# Altium PCB PCB1.PcbDoc
Units mm, origin at the board's own origin, x right, y up, seen from the top; angles counter-clockwise.
Board outline 45 x 30 mm, 4 copper layers (L1 (Signal), L2 (GND), L3 (PWR), L4 (Signal)), stack 1.57 mm thick; 39 components, 27 nets, 199 pads, 73 vias.
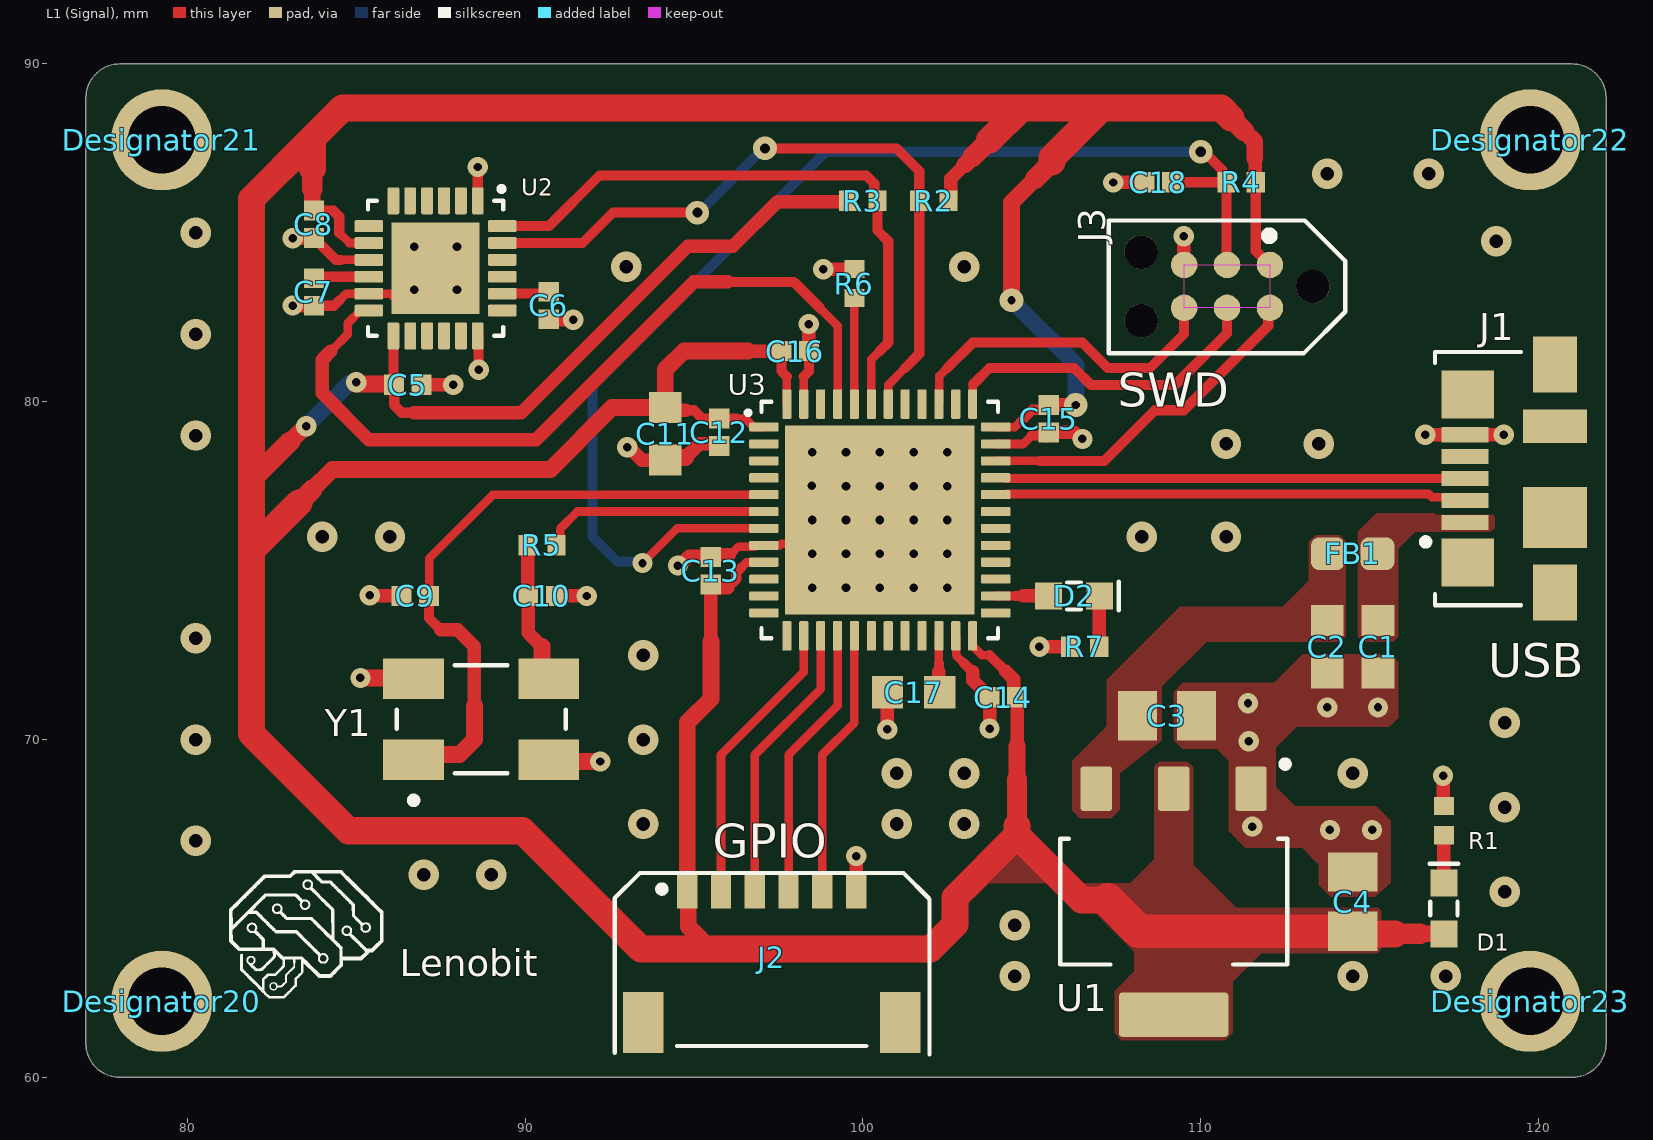
[diagram p0: L1 (Signal) view]
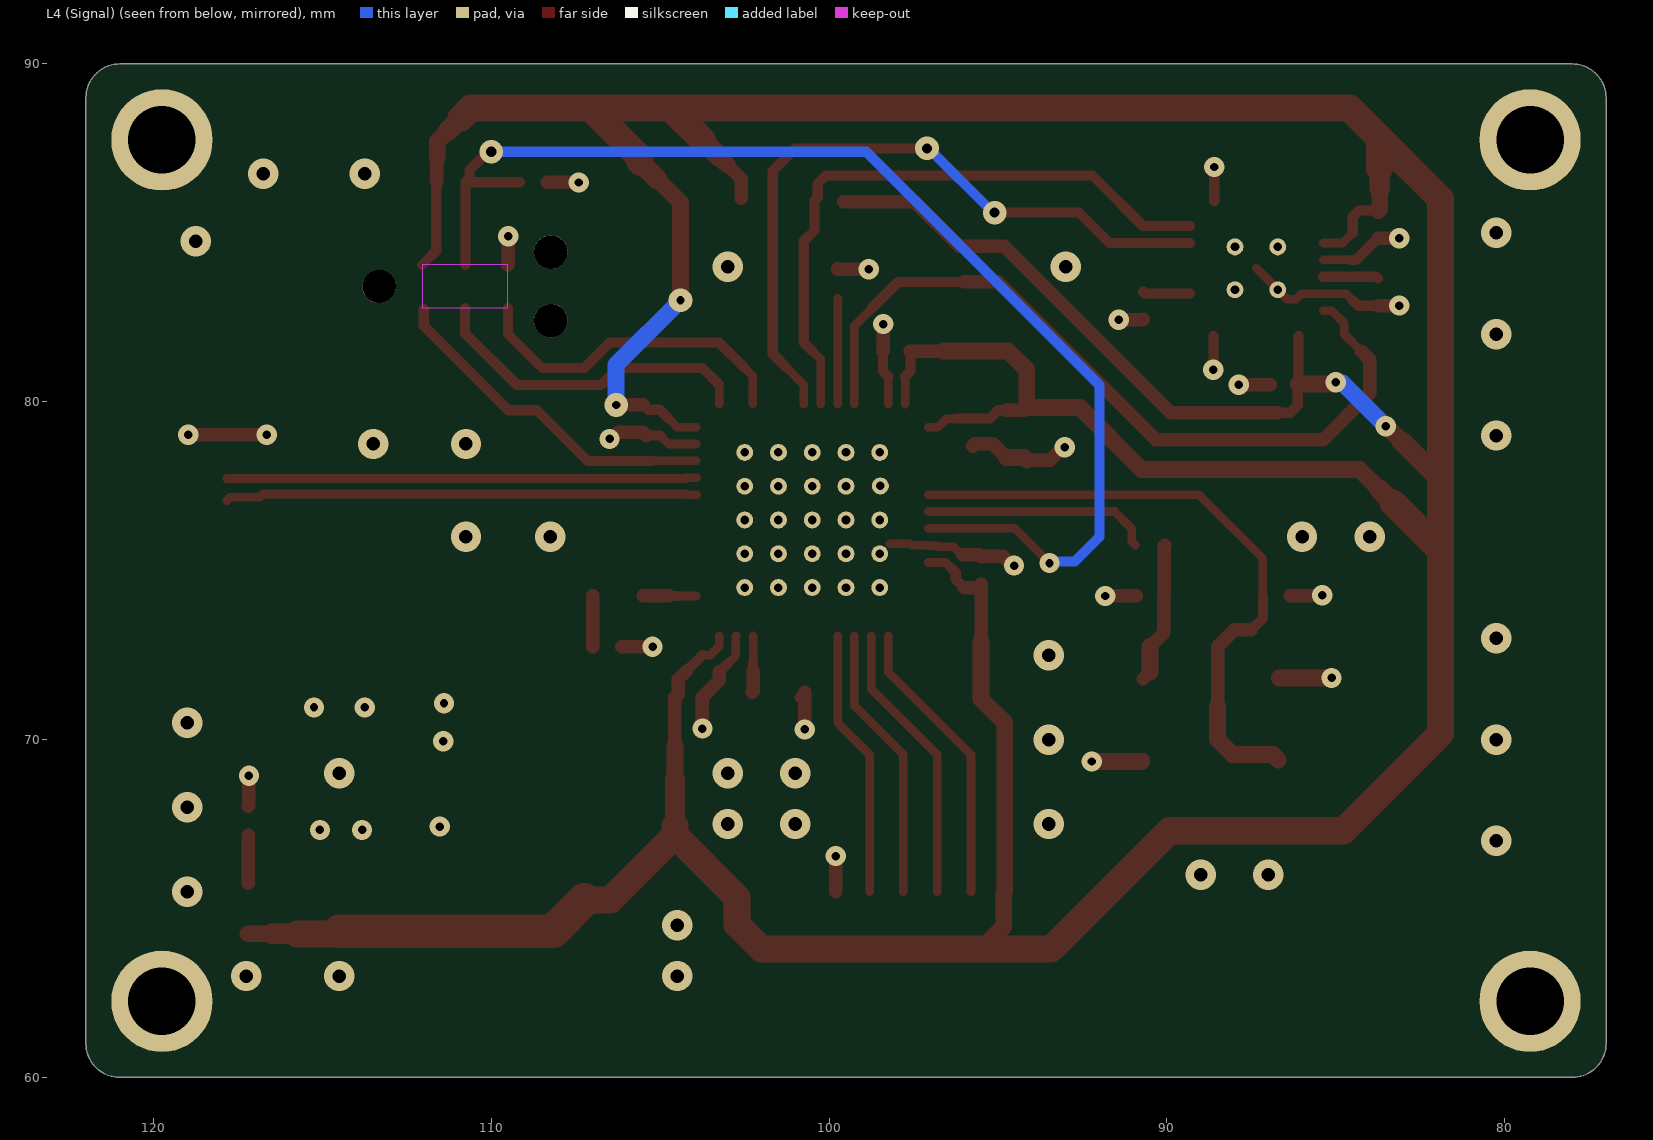
[diagram p1: L4 (Signal) view, seen from below]
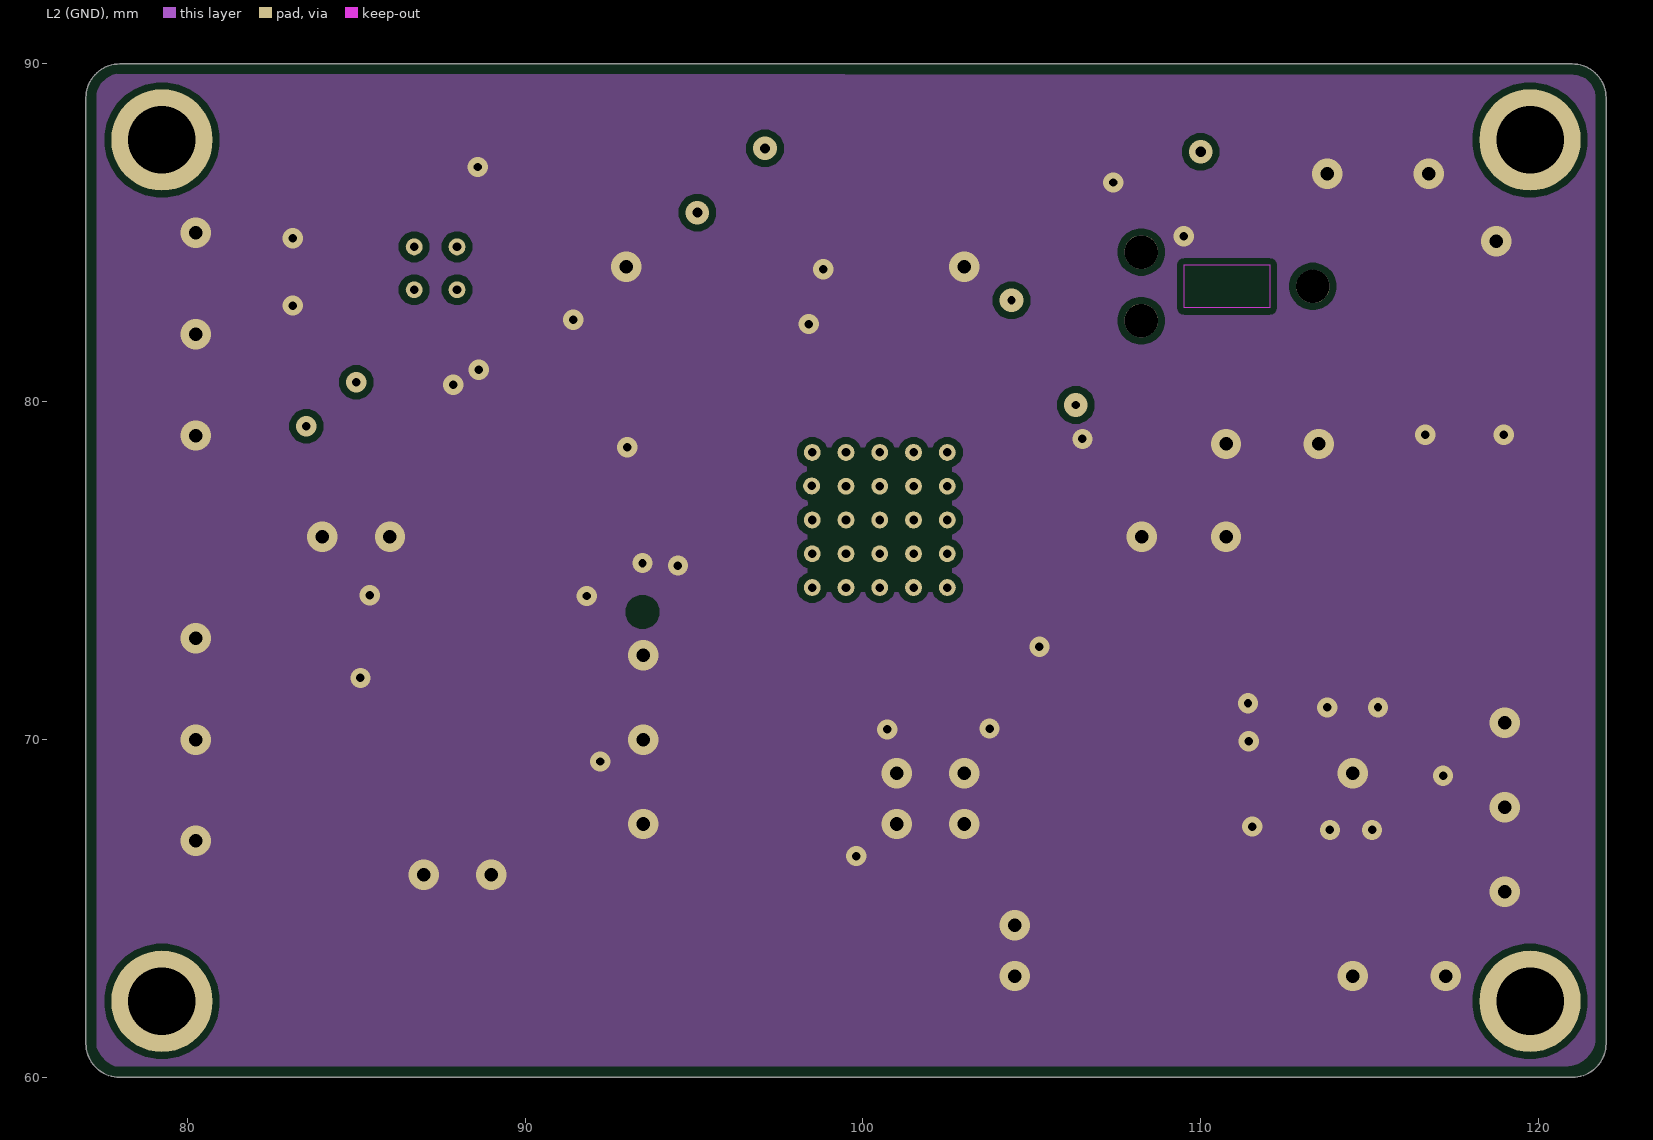
[diagram p2: L2 (GND)]
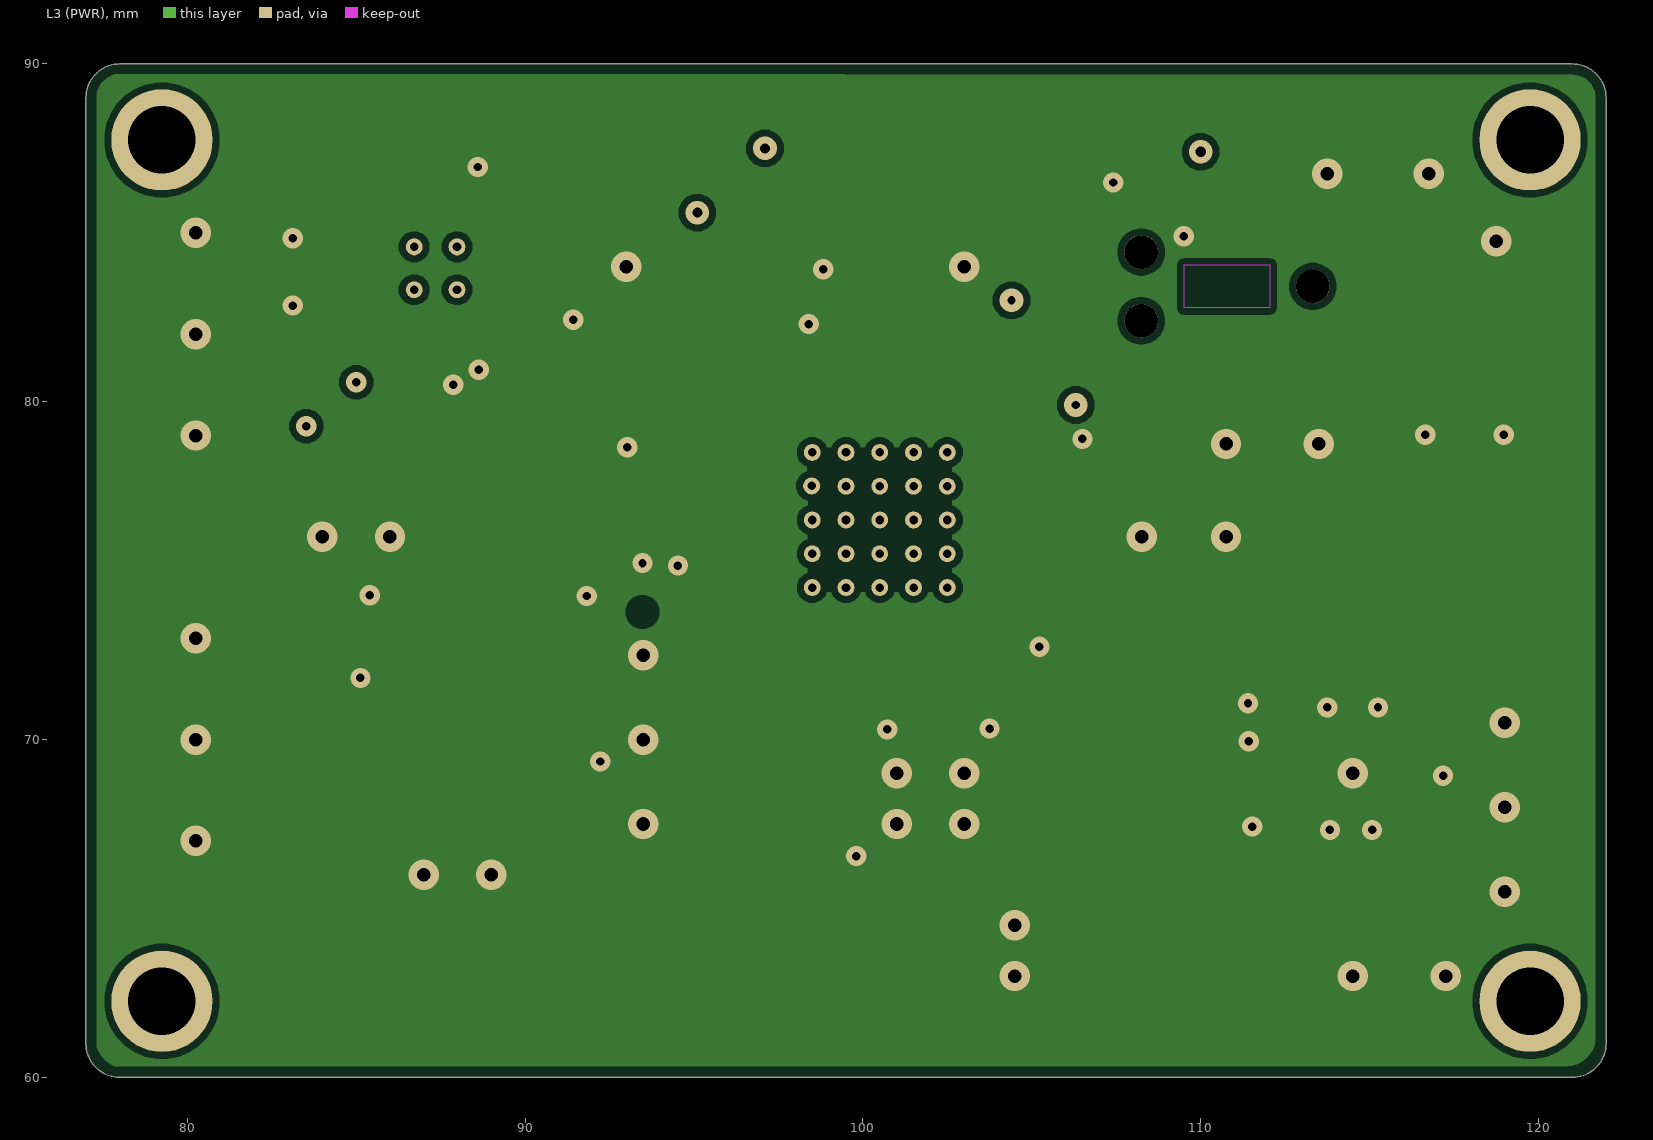
[diagram p3: L3 (PWR)]
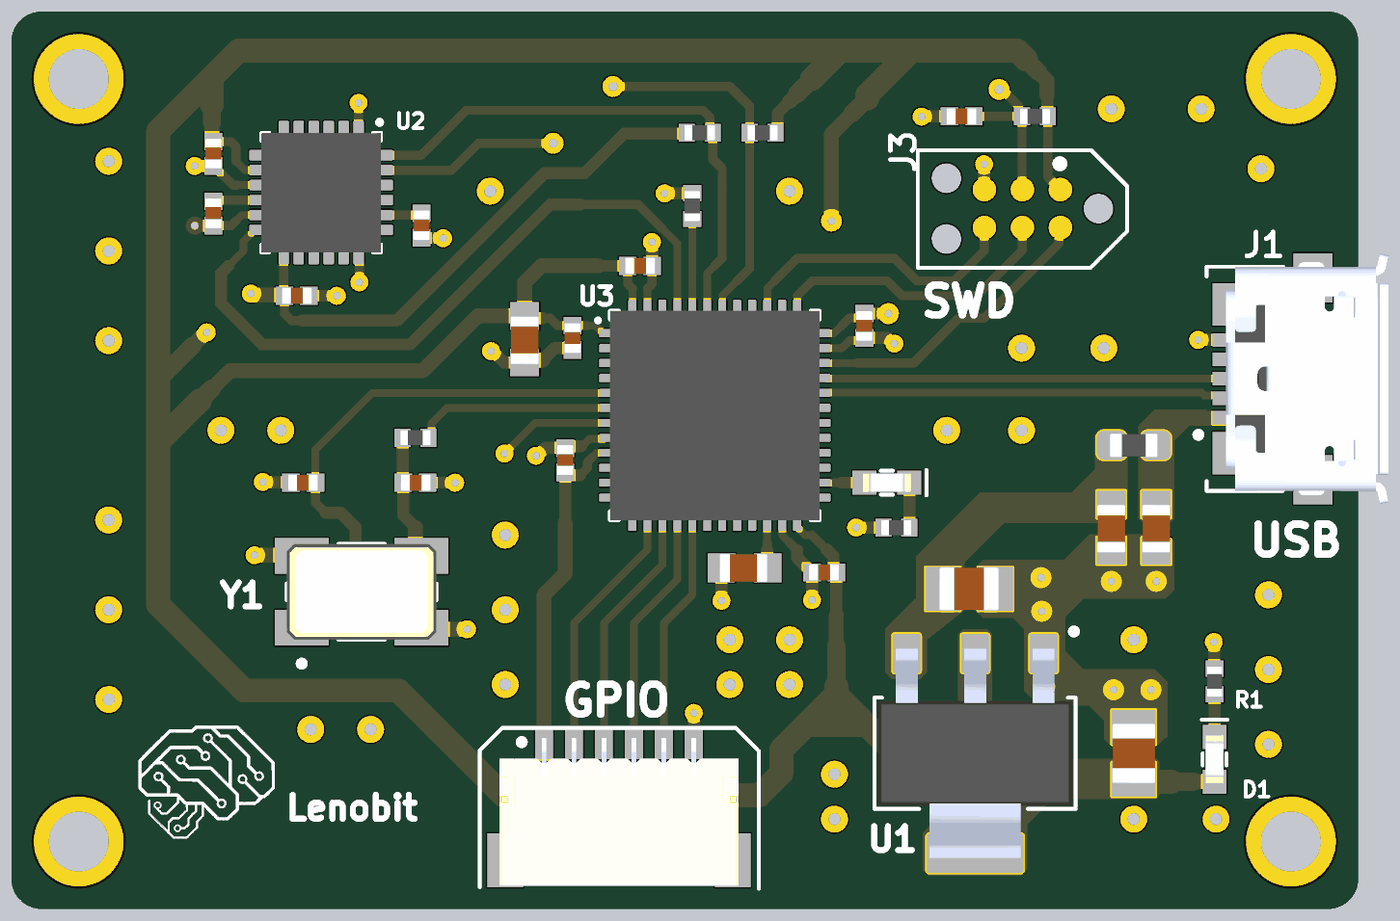
[diagram p4: 3D render of the assembled board from above, using the file's embedded part models]

## Layer stack, top to bottom
Top Solder: solder mask 0.0254, SM-001, Dk 4
L1 (Signal): signal copper 0.035
Dielectric 1: prepreg 0.2, PP-017, Dk 4.6
L2 (GND): signal copper 0.0175
Dielectric 3: core 1.065, Core-039, Dk 4.6
L3 (PWR): signal copper 0.0175
Dielectric 5: prepreg 0.2, PP-017, Dk 4.6
L4 (Signal): signal copper 0.035
Bottom Solder: solder mask 0.0254, SM-001, Dk 4

## Board outline
77,61 77,89 cw(c78,89) 78,90 121,90 cw(c121,89) 122,89 122,61 cw(c121,61) 121,60 78,60 cw(c78,61)

## Design rules (kind name [scope] priority, off if disabled: settings)
Clearance [All] p1: gap=0.2 ignorepadtopadclearanceinfootprint=FALSE except(0: Arc-Hole Track-Hole SMDPad-Hole THPad-Hole Via-Hole Fill-Hole Poly-Hole Region-Hole Text-Hole)
DiffPairsRouting [All] p1: maxlimit=0.203 minlimit=0.127 mostfreqgap=0.203 toplayer_mingap=0.203 toplayer_minwidth=0.26 toplayer_maxwidth=0.26 toplayer_prefwidth=0.26 midlayer1_maxgap=0.127 midlayer1_prefgap=0.127 midlayer1_minwidth=0.139 midlayer1_maxwidth=0.139 midlayer1_prefwidth=0.139 midlayer2_maxgap=0.127 midlayer2_prefgap=0.127 midlayer2_minwidth=0.139 midlayer2_maxwidth=0.139 midlayer2_prefwidth=0.139 bottomlayer_mingap=0.203 bottomlayer_minwidth=0.26 bottomlayer_maxwidth=0.26 bottomlayer_prefwidth=0.26 impedanceprofiledriven=TRUE impedanceprofileid={67C6D984-D5B5-4A22-87A4-B441688D3930} impedanceprofilevalue=90.000000 maxuncoupledlength=12.7
PolygonConnect [All] p1: connectstyle=Direct reliefconductorwidth=0.254 reliefentries=4 polygonreliefangle="90 Angle" airgapwidth=0.254
RoutingVias [All] p1: holewidth=0.3 width=0.7 viastyle="Through Hole" minholewidth=0.25 minwidth=0.55 maxholewidth=0.4 maxwidth=0.9
SolderMaskExpansion [All] p1: expansion=0.05 istentingtop=FALSE
UnRoutedNet [All] p1: checkbadconnections=TRUE
Width [All] p1: maxlimit=1 minlimit=0.2 preferedwidth=0.3 midlayer1_minwidth=0.254 midlayer1_maxwidth=0.254 midlayer1_prefwidth=0.254 midlayer2_minwidth=0.254 midlayer2_maxwidth=0.254 midlayer2_prefwidth=0.254 minimp=50.000000 maximp=50.000000 favimp=50.000000
28 further rules are at their usual default settings.

## Classes and differential pairs
differential pair USB_D: +USB_D_P -USB_D_N

## Components (designator, comment, footprint, x,y, rotation, side; value= is the part's Value field where it differs from the comment)
C1 "CAP_0603" CAPC1608X90N 115.25,72.75 r90 top value=2u2
C2 "CAP_0603" CAPC1608X90N 113.75,72.75 r90 top value=2u2
C3 "CAP_0805_16V" CAPC2012X145N 109,70.7 r180 top value=22u
C4 "CAP_0603" CAPC2012X145N 114.5,65.2 r270 top value=22u
C5 "CAP_0402" CAPC1005X55N 86.532,80.5 r180 top value=100n
C6 "CAP_0402" CAPC1005X55N 90.7,82.85 r270 top value=2n2
C7 "CAP_0402" CAPC1005X55N 83.75,83.25 r270 top value=100n
C8 "CAP_0402" CAPC1005X55N 83.75,85.25 r270 top value=10n
C9 "CAP_0402_16V" CAPC1005X55N 86.75,74.25 r0 top value=10p
C10 "CAP_0402_16V" CAPC1005X55N 90.5,74.25 r180 top value=10p
C11 "CAP_0603" CAPC1608X90N 94.15,79.05 r90 top value=2u2
C12 "CAP_0402" CAPC1005X55N 95.75,79.093 r90 top value=100n
C13 "CAP_0402" CAPC1005X55N 95.5,75 r270 top value=100n
C14 "CAP_0402" CAPC1005X55N 104.157,71.25 r0 top value=100n
C15 "CAP_0402" CAPC1005X55N 105.5,79.5 r90 top value=100n
C16 "CAP_0402" CAPC1005X55N 98,81.5 r180 top value=100n
C17 "CAP_0603" CAPC1608X90N 101.5,71.4 r0 top value=2u2
C18 "CAP_0402" CAPC1005X55N 108.75,86.5 r0 top value=100n
D1 "HSMS-C190" LEDM1608X80 117.2,65 r270 top
D2 "HSMS-C190_1" LEDM1608X80 106.25,74.25 r180 top
Designator20 "Comment" Fix-Hole-2mm 79.25,62.25 r0 top
Designator21 "Comment" Fix-Hole-2mm 79.25,87.75 r0 top
Designator22 "Comment" Fix-Hole-2mm 119.75,87.75 r0 top
Designator23 "Comment" Fix-Hole-2mm 119.75,62.25 r0 top
FB1 "120R" BEADC1608X75N 114.5,75.5 r180 top
J1 "47346-0001" MOLEX_47346-0001 120.485,77.725 r90 top
J2 "1722872105" JST_SM06B-SRSS-TB(LF)(SN) 97.3,65.5 r0 top
J3 "TC2030-IDC-NL" TAG_TC2030-IDC-NL 110.78,83.415 r180 top
R1 "RES_0402" RESC1005X37N 117.2,67.6 r270 top value=1K
R2 "RES_0402" RESC1005X37N 102.1,85.95 r0 top value=2k2
R3 "RES_0402" RESC1005X37N 100,85.95 r180 top value=2k2
R4 "RES_0402" RESC1005X37N 111.2,86.5 r0 top value=10k
R5 "RES_0402" RESC1005X37N 90.5,75.75 r180 top value=0Ω
R6 "RES_0402" RESC1005X37N 99.75,83.5 r270 top value=10k
R7 "RES_0402" RESC1005X37N 106.568,72.75 r180 top value=10K
U1 "AMS1117" SOT229P700X180-4N 109.2,65.2 r270 top
U2 "MPU-6050" IC_MPU6050 87.35,83.95 r270 top
U3 "STM32F411CEU6" QFN50P700X700X60-49N 100.5,76.5 r0 top
Y1 "ABM3B-25.000MHZ-10-1-U-T" OSC_ABM3B-25.000MHZ-10-1-U-T 88.7,70.6 r90 top value=25MHz

## Footprints (in the part's own frame and the unit in brackets; to place one, negate y for a bottom-side part, rotate by r counter-clockwise, add the part's x,y. Pads: shape width x height; smd on the part's side, far side on the other; paste and mask are expansions set on the pad)
BEADC1608X75N [mm]
  rrect50% 1x0.97 smd: 1(-0.735,0) 2(0.735,0)
  body extent -0.8,-0.4 0.8,0.4, height 0.95
CAPC1005X55N [mm]
  rect 0.59x0.6 smd: 1(-0.407,0) 2(0.407,0)
  body extent -0.51,-0.28 0.49,0.27, height 0.51
CAPC1608X90N [mm]
  rect 0.92x0.97 smd: 1(-0.775,0) 2(0.775,0)
  body extent -0.84,-0.48 0.76,0.48, height 0.81
CAPC2012X145N [mm]
  rect 1.16x1.47 smd: 1(-0.875,0) 2(0.875,0)
  body extent -1,-0.72 1,0.72, height 1.26
Fix-Hole-2mm [mm]
  round 3 hole 2 mask+0.076: MH(0,0)
IC_MPU6050 [mm]
  rrect25% 0.8x0.35 smd: 1(-2,1.25) 2(-2,0.75) 3(-2,0.25) 4(-2,-0.25) 5(-2,-0.75) 6(-2,-1.25) 13(2,-1.25) 14(2,-0.75) 15(2,-0.25) 16(2,0.25) 17(2,0.75) 18(2,1.25)
  rrect25% 0.35x0.85 smd: 7(-1.25,-1.975) 8(-0.75,-1.975) 9(-0.25,-1.975) 10(0.25,-1.975) 11(0.75,-1.975) 12(1.25,-1.975) 19(1.25,1.975) 20(0.75,1.975) 21(0.25,1.975) 22(-0.25,1.975) 23(-0.75,1.975) 24(-1.25,1.975)
  rect 2.7x2.6 smd paste-2: 25(0,0)
  round 0.5 hole 0.254: GND(-0.635,0.635) GND(-0.635,-0.635) GND(0.635,0.635) GND(0.635,-0.635)
  silkscreen extent -2.4,-2 2,2, body extent -2,-2 2,2, height 0.94
JST_SM06B-SRSS-TB(LF)(SN) [mm]
  rect 0.6x1 smd: 1(-2.5,0) 2(-1.5,0) 3(-0.5,0) 4(0.5,0) 5(1.5,0) 6(2.5,0)
  rect 1.2x1.8 smd: S1(-3.8,-3.875) S2(3.8,-3.875)
  silkscreen extent -4.65,-4.82 4.67,0.55, body extent -4,-4.72 4,0.22, height 2.91
LEDM1608X80 [mm]
  rect 0.8x0.8 smd: A(0.75,0) K(-0.75,0)
  silkscreen extent -1.33,-0.43 0.2,0.43, body extent -0.8,-0.3 0.8,0.3, height 1.01
MOLEX_47346-0001 [mm]
  rect 0.45x1.38 smd: 1(-1.3,2.66) 2(-0.65,2.66) 3(0,2.66) 4(0.65,2.66) 5(1.3,2.66)
  rect 1.425x1.55 smd: S1(-2.488,2.575) S2(2.488,2.575)
  rect 1.65x1.3 smd: S3(-3.375,0) S6(3.375,0)
  rect 1.8x1.9 smd: S4(-1.15,0)
  rect 1x1.9 smd: S5(1.55,0)
  silkscreen extent -3.75,1 3.75,3.92, body extent -4.18,-2.53 4.18,2.9, height 2.7
OSC_ABM3B-25.000MHZ-10-1-U-T [mm]
  rect 1.2x1.8 smd: 1(-1.2,2) 2(-1.2,-2) 3(1.2,-2) 4(1.2,2)
  silkscreen extent -2.5,-2.5 1.6,2.5, body extent -1.6,-2.5 1.6,2.5, height 1.1
QFN50P700X700X60-49N [mm]
  rrect25% 0.87x0.27 smd: 1(-3.43,2.75) 2(-3.43,2.25) 3(-3.43,1.75) 4(-3.43,1.25) 5(-3.43,0.75) 6(-3.43,0.25) 7(-3.43,-0.25) 8(-3.43,-0.75) 9(-3.43,-1.25) 10(-3.43,-1.75) 11(-3.43,-2.25) 12(-3.43,-2.75) 25(3.43,-2.75) 26(3.43,-2.25) 27(3.43,-1.75) 28(3.43,-1.25) 29(3.43,-0.75) 30(3.43,-0.25) 31(3.43,0.25) 32(3.43,0.75) 33(3.43,1.25) 34(3.43,1.75) 35(3.43,2.25) 36(3.43,2.75)
  rrect25% 0.27x0.87 smd: 13(-2.75,-3.43) 14(-2.25,-3.43) 15(-1.75,-3.43) 16(-1.25,-3.43) 17(-0.75,-3.43) 18(-0.25,-3.43) 19(0.25,-3.43) 20(0.75,-3.43) 21(1.25,-3.43) 22(1.75,-3.43) 23(2.25,-3.43) 24(2.75,-3.43) 37(2.75,3.43) 38(2.25,3.43) 39(1.75,3.43) 40(1.25,3.43) 41(0.75,3.43) 42(0.25,3.43) 43(-0.25,3.43) 44(-0.75,3.43) 45(-1.25,3.43) 46(-1.75,3.43) 47(-2.25,3.43) 48(-2.75,3.43)
  rect 5.6x5.6 smd paste-4: 49(0,0)
  round 0.5 hole 0.254: GND(-2.018,1.008) GND(-2,-2) GND(-2,-1) GND(-2,0) GND(-2,2) GND(-1,-2) GND(-1,-1) GND(-1,0) GND(-1,1) GND(-1,2) GND(0,-2) GND(0,-1) GND(0,0) GND(0,1) GND(0,2) GND(1,-2) GND(1,-1) GND(1,0) GND(1,1) GND(1,2) GND(2,-2) GND(2,-1) GND(2,0) GND(2,1) GND(2,2)
  silkscreen extent -3.93,-3.5 3.5,3.5, body extent -3.5,-3.5 3.5,3.5, height 0.6
RESC1005X37N [mm]
  rect 0.54x0.6 smd: 1(-0.432,0) 2(0.432,0)
  body extent -0.5,-0.25 0.5,0.25, height 0.38
SOT229P700X180-4N [mm]
  rrect15% 1.31x0.93 smd: 1(-3.345,2.29) 2(-3.345,0) 3(-3.345,-2.29)
  rrect15% 1.31x3.24 smd: 4(3.345,0)
  silkscreen extent -4.17,-3.36 1.86,3.4, body extent -3.5,-3.25 3.5,3.25, height 1.8
TAG_TC2030-IDC-NL [mil]
  round 30.98 smd paste-39.37: 1(-50,-25) 2(-50,25) 3(0,-25) 4(0,25) 5(50,-25) 6(50,25)
  round 39.02 hole 39.02 unplated: ""(-100,0) ""(100,-40) ""(100,40)
  Keep-Out Layer region: 50,-25.03 -50.06,-25.03 -50.06,25 50,25
  silkscreen extent -138,-77 138,78

## Part data
C1 C11 C17: library part C0603_16V, "C0603C225K4PACTU / 2.2ÂµF Â±10% 16V Ceramic Capacitor X5R 0603 _1608 Metric_", Package="0603 KEMET", Availability=Unavailable, MF=KEMET, MP=C0603C225K4PACTU, Price=None, SnapEDA_Link=https://www.snapeda.com/parts/C0603C225K4PACTU/KEMET/view-part/609526/?ref=snap
C2: library part CAP_0603_16V, "C0603C225K4PACTU / 2.2ÂµF Â±10% 16V Ceramic Capacitor X5R 0603 _1608 Metric_", Package="0603 KEMET", Availability=Unavailable, MF=KEMET, MP=C0603C225K4PACTU, Price=None, SnapEDA_Link=https://www.snapeda.com/parts/C0603C225K4PACTU/KEMET/view-part/609526/?ref=snap
C3: "C0805C226M8PAC7800 / 22ÂµF Â±20% 16V Ceramic Capacitor X5R 0805 _2012 Metric_", Package="2012 KEMET", Digi-Key_Part_Number=399-12069-1-ND, Digi-Key_Purchase_URL=https://www.digikey.com/product-detail/en/kemet/C0805C226M8PAC7800/399-12069-1-ND/5327671?utm_source=snapeda&utm_medium=aggregator&utm_campaign=symbol, MF=KEMET, MP=C0805C226M8PAC7800, SnapEDA_Link=https://www.snapeda.com/parts/C0805C226M8PAC7800/KEMET/view-part/3932518/?ref=snap
C4: library part CAP_0805_16V, "C0805C226M8PAC7800 / 22ÂµF Â±20% 16V Ceramic Capacitor X5R 0805 _2012 Metric_", Package="2012 KEMET", Digi-Key_Part_Number=399-12069-1-ND, Digi-Key_Purchase_URL=https://www.digikey.com/product-detail/en/kemet/C0805C226M8PAC7800/399-12069-1-ND/5327671?utm_source=snapeda&utm_medium=aggregator&utm_campaign=symbol, MF=KEMET, MP=C0805C226M8PAC7800, SnapEDA_Link=https://www.snapeda.com/parts/C0805C226M8PAC7800/KEMET/view-part/3932518/?ref=snap
C5 C6 C7 C8: library part CAP_0402_16V, "C0402C104K4RAC7411_KEMET / 0.1ÂµF Â±10% 16V Ceramic Capacitor X7R 0402 (1005 Metric)", Package="1005 KEMET", Digi-Key_Part_Number=399-C0402C104K4RAC7411CT-ND, MF=KEMET, MP=C0402C104K4RAC7411, SnapEDA_Link=https://www.snapeda.com/parts/C0402C104K4RAC7411/KEMET/view-part/3213918/?ref=snap
C9 C10: "C0402C104K4RAC7411_KEMET / 0.1ÂµF Â±10% 16V Ceramic Capacitor X7R 0402 (1005 Metric)", Package="1005 KEMET", Digi-Key_Part_Number=399-C0402C104K4RAC7411CT-ND, MF=KEMET, MP=C0402C104K4RAC7411, SnapEDA_Link=https://www.snapeda.com/parts/C0402C104K4RAC7411/KEMET/view-part/3213918/?ref=snap
C12 C13 C14 C15 C16 C18: library part C0402_16V, "C0402C104K4RAC7411_KEMET / 0.1ÂµF Â±10% 16V Ceramic Capacitor X7R 0402 (1005 Metric)", Package="1005 KEMET", Digi-Key_Part_Number=399-C0402C104K4RAC7411CT-ND, MF=KEMET, MP=C0402C104K4RAC7411, SnapEDA_Link=https://www.snapeda.com/parts/C0402C104K4RAC7411/KEMET/view-part/3213918/?ref=snap
D1: "Red 626nm LED Indication - Discrete 2.1V 0603 _1608 Metric_", Package="0603 Broadcom", Availability=Unavailable, MF="Broadcom Limited", MP=HSMS-C190, Price=None, SnapEDA_Link=https://www.snapeda.com/parts/HSMS-C190/Broadcom%20Limited/view-part/1781258/?ref=snap
D2: library part HSMS-C190_RD, "Red 626nm LED Indication - Discrete 2.1V 0603 _1608 Metric_", Package="0603 Broadcom", Availability=Unavailable, MF="Broadcom Limited", MP=HSMS-C190, Price=None, SnapEDA_Link=https://www.snapeda.com/parts/HSMS-C190/Broadcom%20Limited/view-part/1781258/?ref=snap
FB1: library part BLM18KG102WH1D, "1 kOhms @ 100MHz 1 GÃ¼Ã§ HattÄ± Ferrit Boncuk 0603 (1608 Metrik) 800mA 230mOhm", Package="0603 Murata", Availability=Good, Check_prices=https://www.snapeda.com/parts/BLM18KG102WH1D/Murata/view-part/4970268/?ref=eda, MF=Murata, MP=BLM18KG102WH1D, Price=None, Purchase-URL=https://pricing.snapeda.com/search/part/BLM18KG102WH1D/?ref=eda, SnapEDA_Link=https://www.snapeda.com/parts/BLM18KG102WH1D/Murata/view-part/4970268/?ref=snap
J1: "USB Connectors MICRO USB B RECPT BTTM MOUNT ASSY", Package=None, Availability=Warning, Check_prices=https://www.snapeda.com/parts/47346-0001/Molex/view-part/53503/?ref=eda, MF=Molex, MP=47346-0001, Price=None, Purchase-URL=https://pricing.snapeda.com/search/part/47346-0001/?ref=eda, SnapEDA_Link=https://www.snapeda.com/parts/47346-0001/Molex/view-part/53503/?ref=snap
J2: library part SM06B-SRSS-TB, "Connector Header Surface Mount, Right Angle 6 position 0.039\" (1.00mm)", Package=None, Availability=Unavailable, MP=1722872105, Price=None
J3: "CABLE ADAPTER 6 POS", Package=None, Availability=Unavailable, MP=TC2030-IDC-NL, Price=None
R1 R2 R3 R4 R5 R6 R7: "AC0402 10K 5% 0,063W AUTOMO", Package=None, Availability=Unavailable, MP=AC0402JR-0710KL, Price=None
U1: "Sot223/Pkg 1-Amp 5-Volt Low Drop Out Voltage Regulatator", Package=None, Availability=Unavailable, MP=AMS1117, Price=None
U2: library part MPU6050, "Is the worldâ€™s first integrated 6-axis MotionTracking device that combines a 3-axis gyroscope, 3-axis accelerometer, and a Digital Motion Processorâ„¢ (DMP) all in a small 4x4x0.9mm Package.", Package=None, Availability=Unavailable, MP=MPU6050, Price=None
U3: "ARMÂ® CortexÂ®-M4 STM32F4 Microcontroller IC 32-Bit 100MHz 512KB (512K x 8) FLASH 48-UFQFPN (7x7)", Package="UFQFN-48 STMicroelectronics", Availability=Good, DigiKey-Purchase-URL=https://snapeda.com/shop?store=DigiKey&id=383021, MF=STMicroelectronics, Mouser-Purchase-URL=https://snapeda.com/shop?store=Mouser&id=383021, MP=STM32F411CEU6, Price=None, SnapEDA_Link=https://www.snapeda.com/parts/STM32F411CEU6/STMicroelectronics/view-part/383021/?ref=snap
Y1: "25 MHz Â±10ppm Crystal 10pF 50 Ohms 4-SMD, No Lead", Package="SMD-4 Abracon LLC", Availability="In Stock", Check_prices=https://www.snapeda.com/parts/ABM3B-25.000MHZ-10-1-U-T/Abracon+LLC/view-part/?ref=eda, MF=Abracon, MP=ABM3B-25.000MHZ-10-1-U-T, Price=None, Purchase-URL=https://pricing.snapeda.com/search/part/ABM3B-25.000MHZ-10-1-U-T/?ref=eda, SnapEDA_Link=https://www.snapeda.com/parts/ABM3B-25.000MHZ-10-1-U-T/Abracon+LLC/view-part/?ref=snap

## Via types
v1: diameter 0.9, hole 0.4, L1 (Signal) to L4 (Signal), 34 vias
v2: diameter 0.6, hole 0.25, L1 (Signal) to L4 (Signal), 33 vias
v3: diameter 0.7, hole 0.3, L1 (Signal) to L4 (Signal), 3 vias
v4: diameter 0.7, hole 0.25, L1 (Signal) to L4 (Signal), 2 vias
v5: diameter 0.6, hole 0.25, L1 (Signal) to L4 (Signal), tented top, 1 vias

## Nets (pads, with @x,y where several pads share a name; then routed paths per layer and width w, separated by ;. In a path a pad name is that pad's centre, name@x,y a point inside that pad or via, vN(x,y) a via of type N, cw(c..) or ccw(c..) an arc to the next point about the centre after c; other vN are vias at no path point)
+3V3: C4.2 C5.2 C8.1 C11.2 C12.2 C13.2 C14.2 C15.2 C16.2 D1.A J2.1 J3.1 R2.2 R3.2 R4.2 U1.2 U1.4 U2.8 U2.13 U3.1 U3.9 U3.24 U3.36 U3.48 | length 180.3
  L1 (Signal) w0.254: 84.5,85 84.8,84.7 U2.8 ; 96.25,79.5 96.52,79.5 96.77,79.25 U3.1 ; 96.404,75.096 96.549,75.242 97.062,75.242 U3.9 ; U3.48 97.75,80.75 ; U3.24 103.25,72.77 103.52,72.5 103.75,72.5 ; U3.36 104.5,79.25 104.75,79.5
  L1 (Signal) w0.3: C8.1 84.324,85.657 84.5,85.481 84.5,85 ; U2.13 86.1,80.525 86.103,80.522 C5.2 86.125,79.9 86.35,79.675 86.725,79.675 ; 94.75,79.75 95,79.75 95.25,79.5 C12.2 96.25,79.5 ; 96,74.5 96.25,74.75 96.25,74.943 96.404,75.096 ; C16.2 97.593,80.907 97.75,80.75 ; 103.75,72.5 104.225,72.025 ; 104.75,79.5 105.013,79.763 105.356,79.763 C15.2 ; R4.2 111.632,84.469 J3.1@111.891,84.21 ; J3.1@111.891,84.209 J3.1
  L1 (Signal) w0.4: 86.725,79.675 89.89,79.675 94.815,84.6 96.15,84.6 97.47,85.92 R3.2@99.568,85.92 ; C11.2 94.225,79.75 94.75,79.75 ; 95.5,72.9 C13.2 95.505,74.593 95.598,74.5 96,74.5 ; 96.6,81.5 C16.2 ; R2.2@102.6,86.018 102.602,86.02 102.602,86.602 102.75,86.75 103,87 ; 104.225,72.025 104.469,71.781 104.469,71.345 C14.2 104.564,69.814 ; C15.2 105.502,79.905 106.302,79.905 v4(106.304,79.904) ; R4.2@111.612,86.52 111.612,87.188
  L1 (Signal) w0.5: 83.048,78.825 83.498,79.275 v2(83.525,79.275) ; 83.7,77.4 84.3,78 90.75,78 92.575,79.825 C11.2 94.15,80.95 94.7,81.5 96.6,81.5 ; 83.7,86.3 83.7,85.702 83.745,85.657 C8.1 ; v2(85,80.575) 85.027,80.575 85.08,80.522 C5.2@86.103,80.522 ; 95.5,63.8 94.83,64.47 94.83,65.47 J2.1 94.8,70.5 95.5,71.2 95.5,72.9 ; 103,87 103.25,87.25 ; v4(104.4,83) 104.4,85.9 105.1,86.6 ; 104.564,68.814 104.564,69.814 ; 111.3,88 111.6,87.7 111.6,87.2 ; 116.5,64.25 D1.A
  L1 (Signal) w0.6: 81.9,77.677 83.048,78.825 ; 83.3,77 83.7,77.4 ; 83.7,86.3 83.7,86.9 ; 103.25,87.25 103.75,87.75 ; 104.564,67.436 104.564,68.814 ; 105.1,86.6 105.6,87.1 ; 110.9,88.4 111.3,88 ; 115.75,64.25 116.5,64.25
  L1 (Signal) w0.8: 83.3,77 81.9,75.6 ; 83.7,86.9 83.7,87.8 ; 103.75,87.75 104.7,88.7 ; 104.564,67.436 104.564,67.164 ; 105.6,87.1 105.6,87.225 107.075,88.7 ; 107.25,65.25 106.478,65.25 104.564,67.164 ; 110.9,88.4 110.6,88.7 107.075,88.7 ; C4.2@114.575,64.25 115.75,64.25 ; 81.9,75.6 81.9,70.175 84.775,67.3 89.925,67.3 93.425,63.8 95.5,63.8 102,63.8 102.725,64.525 102.725,65.325 104.564,67.164 ; 81.9,75.6 81.9,77.677 81.9,86 83.7,87.8 ; 83.7,87.8 84.6,88.7 104.7,88.7 ; 104.7,88.7 107.075,88.7
  L1 (Signal) w1: 107.25,65.25 108.175,64.325 C4.2
  L4 (Signal) w0.5: v2@83.544,79.294 84.806,80.556 84.981,80.556 v2(85,80.575) ; v4(104.4,83) 106.304,81.096 v4(106.304,79.904)
+5V: C2.2 C3.2 FB1.2 U1.3
GND: C1.1 C2.1 C3.1 C4.1 C5.1 C6.2 C7.2 C8.2 C9.1 C10.1 C11.1 C12.1 C13.1 C14.1 C15.1 C16.1 C17.1 C18.1 J1.5 J2.6 J3.5 R1.1 R6.1 R7.2 U1.1 U2.1 U2.9 U2.11 U2.18 U2.25 U3.8 U3.23 U3.35 U3.47 U3.49 Y1.2 Y1.4 | length 40.7
  L1 (Signal) w0.254: 84.5,83 84.7,83.2 U2.11 86.014,83.2 86.177,83.037 86.437,83.037 U2.25 ; 84.55,84.2 U2.9 ; 96.098,75.524 96.115,75.508 96.319,75.712 96.794,75.712 96.824,75.742 97.062,75.742 U3.8 97.078,75.758 97.558,75.758 97.6,75.8 U3.49@98.2,75.8 ; U3.47 98.25,80.75 ; U3.23 102.758,73.062 102.758,72.492 103,72.25 ; U3.35 104.75,78.75 105,79
  L1 (Signal) w0.3: C7.2 84.343,82.843 84.5,83 ; C8.2 83.755,84.843 84.398,84.2 84.55,84.2 ; U2.1 v2(88.6,86.95) ; v2(88.625,80.95) U2.18@88.625,81.95 ; 96.04,75.465 96.098,75.524 ; 98.25,80.75 98.407,80.907 C16.1 ; C17.1 C17.1@100.875,71.25 ; 103,72.25 103.25,72 ; 105,79 C15.1@105.407,79
  L1 (Signal) w0.4: v5(83.125,82.846) 83.127,82.845 83.748,82.845 C7.2 ; v2(83.125,84.843) C8.2 ; v2(85.4,74.275) 85.412,74.263 86.331,74.263 C9.1 ; Y1.4@86.675,71.825 Y1.4 ; C5.1 v2(87.875,80.5) ; Y1.2 Y1.2@90.75,69.35 ; C6.2 90.709,82.434 91.416,82.434 v2(91.425,82.425) ; C10.1 v2(91.825,74.25) ; v2(93.025,78.65) 93.075,78.65 93.45,78.275 C11.1 ; v2(94.525,75.15) 94.579,75.15 94.854,75.425 95.482,75.425 C13.1 95.558,75.465 96.04,75.465 ; 94.75,78.35 95.15,78.75 95.686,78.75 C12.1 ; v2(98.4,82.3) 98.403,82.297 98.403,81.503 C16.1 ; v2(98.825,83.925) 98.828,83.929 99.747,83.929 R6.1 ; J2.6 v2(99.8,66.55) ; v2(100.725,70.3) C17.1 ; 103.25,72 103.25,71.755 103.75,71.255 C14.1 v2(103.75,70.325) ; v2(105.225,72.75) R7.2 ; C15.1@105.407,79 C15.1 105.597,79.093 105.6,79.096 106.249,79.096 106.446,78.9 v2(106.5,78.9) ; v2(107.41,86.49) 107.414,86.495 108.338,86.495 C18.1 ; v2(109.5,84.9) 109.505,84.895 109.505,84.055 J3.5 ; v2(116.65,79.025) J1.5 v2(118.975,79.025) ; v2(117.175,68.925) 117.187,68.913 117.187,68.045 R1.1
  L1 (Signal) w0.5: v2(85.125,71.825) Y1.4@86.675,71.825 ; Y1.2@90.75,69.35 v2(92.225,69.35) ; C11.1 94.225,78.35 94.75,78.35
  other v1: 104.5,63 114.5,63 117.25,63 104.5,64.5 119,65.5 87,66 89,66 80.25,67 93.5,67.5 101,67.5 103,67.5 119,68 101,69 103,69 114.5,69 80.25,70 93.5,70 119,70.5 93.5,72.5 80.25,73 84,76 86,76 108.25,76 110.75,76 110.75,78.75 113.5,78.75 80.25,79 80.25,82 93,84 103,84 118.75,84.75 80.25,85 113.75,86.75 116.75,86.75
  other v2: 113.825,67.325 115.075,67.325 111.525,67.425 111.425,69.95 113.75,70.95 115.25,70.95 111.4,71.075
"IMU CPOUT": C6.1 U2.20 | length 1.4
  L1 (Signal) w0.3: U2.20 90.643,83.2 C6.1
"IMU INT": U2.12 U3.45 | length 23.8
  L1 (Signal) w0.254: 84.25,81.5 84.75,82 84.75,82.325 85.125,82.7 U2.12 ; 98.75,82.75 99.25,82.25 U3.45
  L1 (Signal) w0.3: 96,83.55 97.95,83.55 98.75,82.75
  L1 (Signal) w0.4: 84.25,81.5 84,81.25 84,80.25 85.375,78.875 90.325,78.875 95,83.55 96,83.55
"IMU REGOUT": C7.1 U2.10 | length 1.6
  L1 (Signal) w0.3: C7.1 83.793,83.7 U2.10
"IMU SCL": R2.1 U2.23 U3.42 | length 21.1
  L1 (Signal) w0.254: U3.42 100.756,79.936 100.756,80.506 101.25,81
  L1 (Signal) w0.3: U2.23 91.7,84.7 92.6,85.6 v3(95.1,85.6) ; v3(97.1,87.5) 101,87.5 101.668,86.832 R2.1 101.668,81.418 101.25,81
  L4 (Signal) w0.3: v3(95.1,85.6) 95.15,85.6 97.05,87.5 v3(97.1,87.5)
"IMU SDA": R3.1 U2.24 U3.43 | length 18.6
  L1 (Signal) w0.254: U3.43 100.25,81.25 100.5,81.5
  L1 (Signal) w0.3: U2.24 90.7,85.2 92.2,86.7 100.1,86.7 100.338,86.462 100.338,86.044 R3.1 100.432,85.068 100.75,84.75 100.75,81.75 100.5,81.5
"LED PWR K": D1.K R1.2 | length 1.4
  L1 (Signal) w0.4: D1.K R1.2
"MCU BOOT0": R6.2 U3.44 | length 3.1
  L1 (Signal) w0.254: U3.44 R6.2
"MCU LED A": D2.A U3.26 | length 1.6
  L1 (Signal) w0.254: U3.26 104.5,74.25
  L1 (Signal) w0.3: 104.5,74.25 104.75,74.25
  L1 (Signal) w0.4: 104.75,74.25 D2.A
"MCU LED K": D2.K R7.1 | length 1.5
  L1 (Signal) w0.4: R7.1 D2.K
"MCU NRST": C18.2 J3.3 R4.1 U3.7 | length 36.5
  L1 (Signal) w0.254: v2(93.475,75.225) 94.5,76.25 U3.7
  L1 (Signal) w0.3: C18.2 R4.1 ; v3(110,87.4) 110.1,87.4 110.648,86.852 110.648,86.62 R4.1 ; J3.3@110.768,84.05 R4.1
  L4 (Signal) w0.3: v2(93.475,75.225) 93.428,75.272 92.725,75.272 92,75.997 92,80.5 98.9,87.4 v3(110,87.4)
"MCU OSC IN": C9.2 U3.5 Y1.1 | length 19
  L1 (Signal) w0.254: C9.2 87.157,75.357 89.05,77.25 U3.5
  L1 (Signal) w0.3: C9.2 87.157,73.593 87.5,73.25
  L1 (Signal) w0.4: 87.5,73.25 88,73.25 88.5,72.75 88.5,71
  L1 (Signal) w0.5: Y1.1@86.703,69.397 86.862,69.557 88.057,69.557 88.5,70 88.5,71
"MCU OSC OUT": R5.1 U3.6 | length 6.8
  L1 (Signal) w0.254: R5.1 91.041,75.859 91.041,76.241 91.55,76.75 U3.6
"MCU PA4": J2.2 U3.14 | length 8.6
  L1 (Signal) w0.254: J2.2 95.8,69.55 98.25,72 U3.14
"MCU PA5": J2.3 U3.15 | length 8.4
  L1 (Signal) w0.254: J2.3 96.8,69.55 98.75,71.5 U3.15
"MCU PA6": J2.4 U3.16 | length 8.2
  L1 (Signal) w0.254: J2.4 97.8,69.55 99.25,71 U3.16
"MCU PA7": J2.5 U3.17 | length 8
  L1 (Signal) w0.254: J2.5 98.8,69.55 99.75,70.5 U3.17
"MCU SWCLK": J3.4 U3.37 | length 9.9
  L1 (Signal) w0.254: U3.37 103.256,79.936 103.256,80.506
  L1 (Signal) w0.3: 103.256,80.506 103.75,81 106.25,81 106.75,80.5 109.25,80.5 110.78,82.03 J3.4
"MCU SWDIO": J3.2 U3.34 | length 10.2
  L1 (Signal) w0.254: U3.34 105.25,78.25
  L1 (Signal) w0.3: 105.25,78.25 107.15,78.25 108.65,79.75 109.5,79.75 112,82.25 J3.2@112,82.75
"MCU SWO": J3.6 U3.39 | length 10
  L1 (Signal) w0.254: U3.39@102.265,79.945 102.265,80.765 102.5,81
  L1 (Signal) w0.3: 102.5,81 103.25,81.75 106.5,81.75 107.25,81 108.5,81 109.505,82.005 J3.6@109.505,82.78
"MCU VCAP1": C17.2 U3.22 | length 1.7
  L1 (Signal) w0.254: 102.25,72.25 U3.22
  L1 (Signal) w0.3: 102.25,72 102.25,72.25
  L1 (Signal) w0.4: 102.25,72 102.25,71.425 C17.2
USB_D_N: J1.2 U3.32 | length 14
  L1 (Signal) w0.26: U3.32 104.23,77.25 104.248,77.268 110.108,77.268 116.75,77.268 116.848,77.17 117.73,77.17 J1.2
USB_D_P: J1.3 U3.33 | length 13.9
  L1 (Signal) w0.26: U3.33 104.23,77.75 104.248,77.732 110.3,77.732 117.818,77.732 J1.3
VBUS: C1.2 FB1.1 J1.1
"XTAL IN": C10.2 R5.2 Y1.3 | length 4.2
  L1 (Signal) w0.4: R5.2 90.081,75.737 90.081,74.262 C10.2 90.093,73.157 90.5,72.75 ; Y1.3@90.5,72 Y1.3
  L1 (Signal) w0.5: Y1.3@90.5,72 90.5,72.75
pads on no net: Designator20.MH Designator21.MH Designator22.MH Designator23.MH J1.4 J1.S1 J1.S2 J1.S3 J1.S4 J1.S5 J1.S6 J2.S1 J2.S2 J3. U2.2 U2.3 U2.4 U2.5 U2.6 U2.7 U2.14 U2.15 U2.16 U2.17 U2.19 U2.21 U2.22 U2.GND U3.2 U3.3 U3.4 U3.10 U3.11 U3.12 U3.13 U3.18 U3.19 U3.20 U3.21 U3.25 U3.27 U3.28 U3.29 U3.30 U3.31 U3.38 U3.40 U3.41 U3.46 U3.GND

## Polygon pours and split planes (outlines as drawn)
+3V3 on L1 (Signal) "GND" (solid, pour order 3): 102.575,64.925 102.575,65.45 104.562,67.437 106.25,65.75 107.913,65.75 108.625,66.462 108.625,69.2 108.775,69.35 109.6,69.35 109.775,69.175 109.775,66.3 111.05,65.025 115.25,65.025 115.35,64.925 115.35,63.8 115.225,63.675 111.8,63.675 110.95,62.825 110.95,61.325 110.725,61.1 107.65,61.1 107.45,61.3 107.45,62.55 108.038,63.137 108.038,63.712 106.725,65.025 106.25,65.025 105.525,65.75 103.725,65.75 102.9,64.925
GND on L1 (Signal) "GND" (solid, pour order 6): 115.625,67.6 115.2,68.025 112.8,68.025 112.225,68.6 112.225,69.75 112.85,70.375 115.575,70.375 115.85,70.65 115.85,72.3 115.625,72.525 113.025,72.525 112.175,71.675 109.475,71.675 109.2,71.4 109.2,69.975 109.45,69.725 110.475,69.725 110.825,69.375 110.825,67.3 111.325,66.8 113,66.8 113.5,66.3 113.5,65.702 113.852,65.35 115.155,65.35 115.625,65.765
+5V on L1 (Signal) "GND" (solid, pour order 2): 113.2,74.7 112.425,73.925 109.375,73.925 107.225,71.775 107.225,70.4 106.2,69.375 106.2,67.9 106.425,67.675 107.35,67.675 107.6,67.925 107.6,69.002 108.85,69.986 108.85,71.575 110.175,72.9 114.1,72.9 114.3,73.05 114.3,75.875 114.125,76.05 113.4,76.05 113.2,75.85
VBUS on L1 (Signal) "GND" (solid, pour order 1): 115.2,76.7 114.65,76.15 114.65,73.05 114.825,72.9 115.7,72.9 115.85,73.05 115.85,75.65 116.35,76.15 118.575,76.15 118.7,76.25 118.7,76.575 118.6,76.7
GND on L2 (GND) "GND" (solid, pour order 4): 77.326,89.126 cw(c78.073,88.956) 77.904,89.704 121.025,89.675 cw(c121.013,89.012) 121.675,89.049 121.675,61.05 cw(c120.814,61.205) 120.75,60.332 77.85,60.332 cw(c78.269,61.261) 77.326,60.875
GND on L3 (PWR) "GND" (solid, pour order 5): 77.326,89.126 cw(c78.073,88.956) 77.904,89.704 121.025,89.675 cw(c121.013,89.012) 121.675,89.049 121.675,61.05 cw(c120.814,61.205) 120.75,60.332 77.85,60.332 cw(c78.269,61.261) 77.326,60.875

## Silkscreen, mask and mechanical layers (free items; w line width, h text height)
Top Overlay:
  region: 891 vertices and 11 holes, not listed, extent 81.245,62.342 85.806,66.135
  text "SWD" at 107.542,79.85 h1
  text "USB" at 118.517,71.85 h1
  text "GPIO" at 95.551,66.5 h1
  text "Lenobit" at 86.284,63 h0.8
Drill Guide:
  lines w0.254: 79.25,62.25 119.75,62.25 119.75,87.75 79.25,87.75 79.25,62.25
Mechanical 1:
  the board outline again, w0.254

## Text inside footprints (layer, text, board x,y; h text height)
J1: Mechanical 13 "PCB EDGE" at 121.735,82.225 h0.41 r90